# Altium PCB ZeroGravity4Layer.PcbDoc
Units mm, origin at the board's own origin, x right, y up, seen from the top; angles counter-clockwise.
Board outline 55.88 x 54.36 mm, 4 copper layers (Top Layer, GND01, GND02, Bottom Layer), stack 0.603 mm thick; 52 components, 42 nets, 160 pads, 30 vias.
Unrouted connection lines stored in the file: 27.
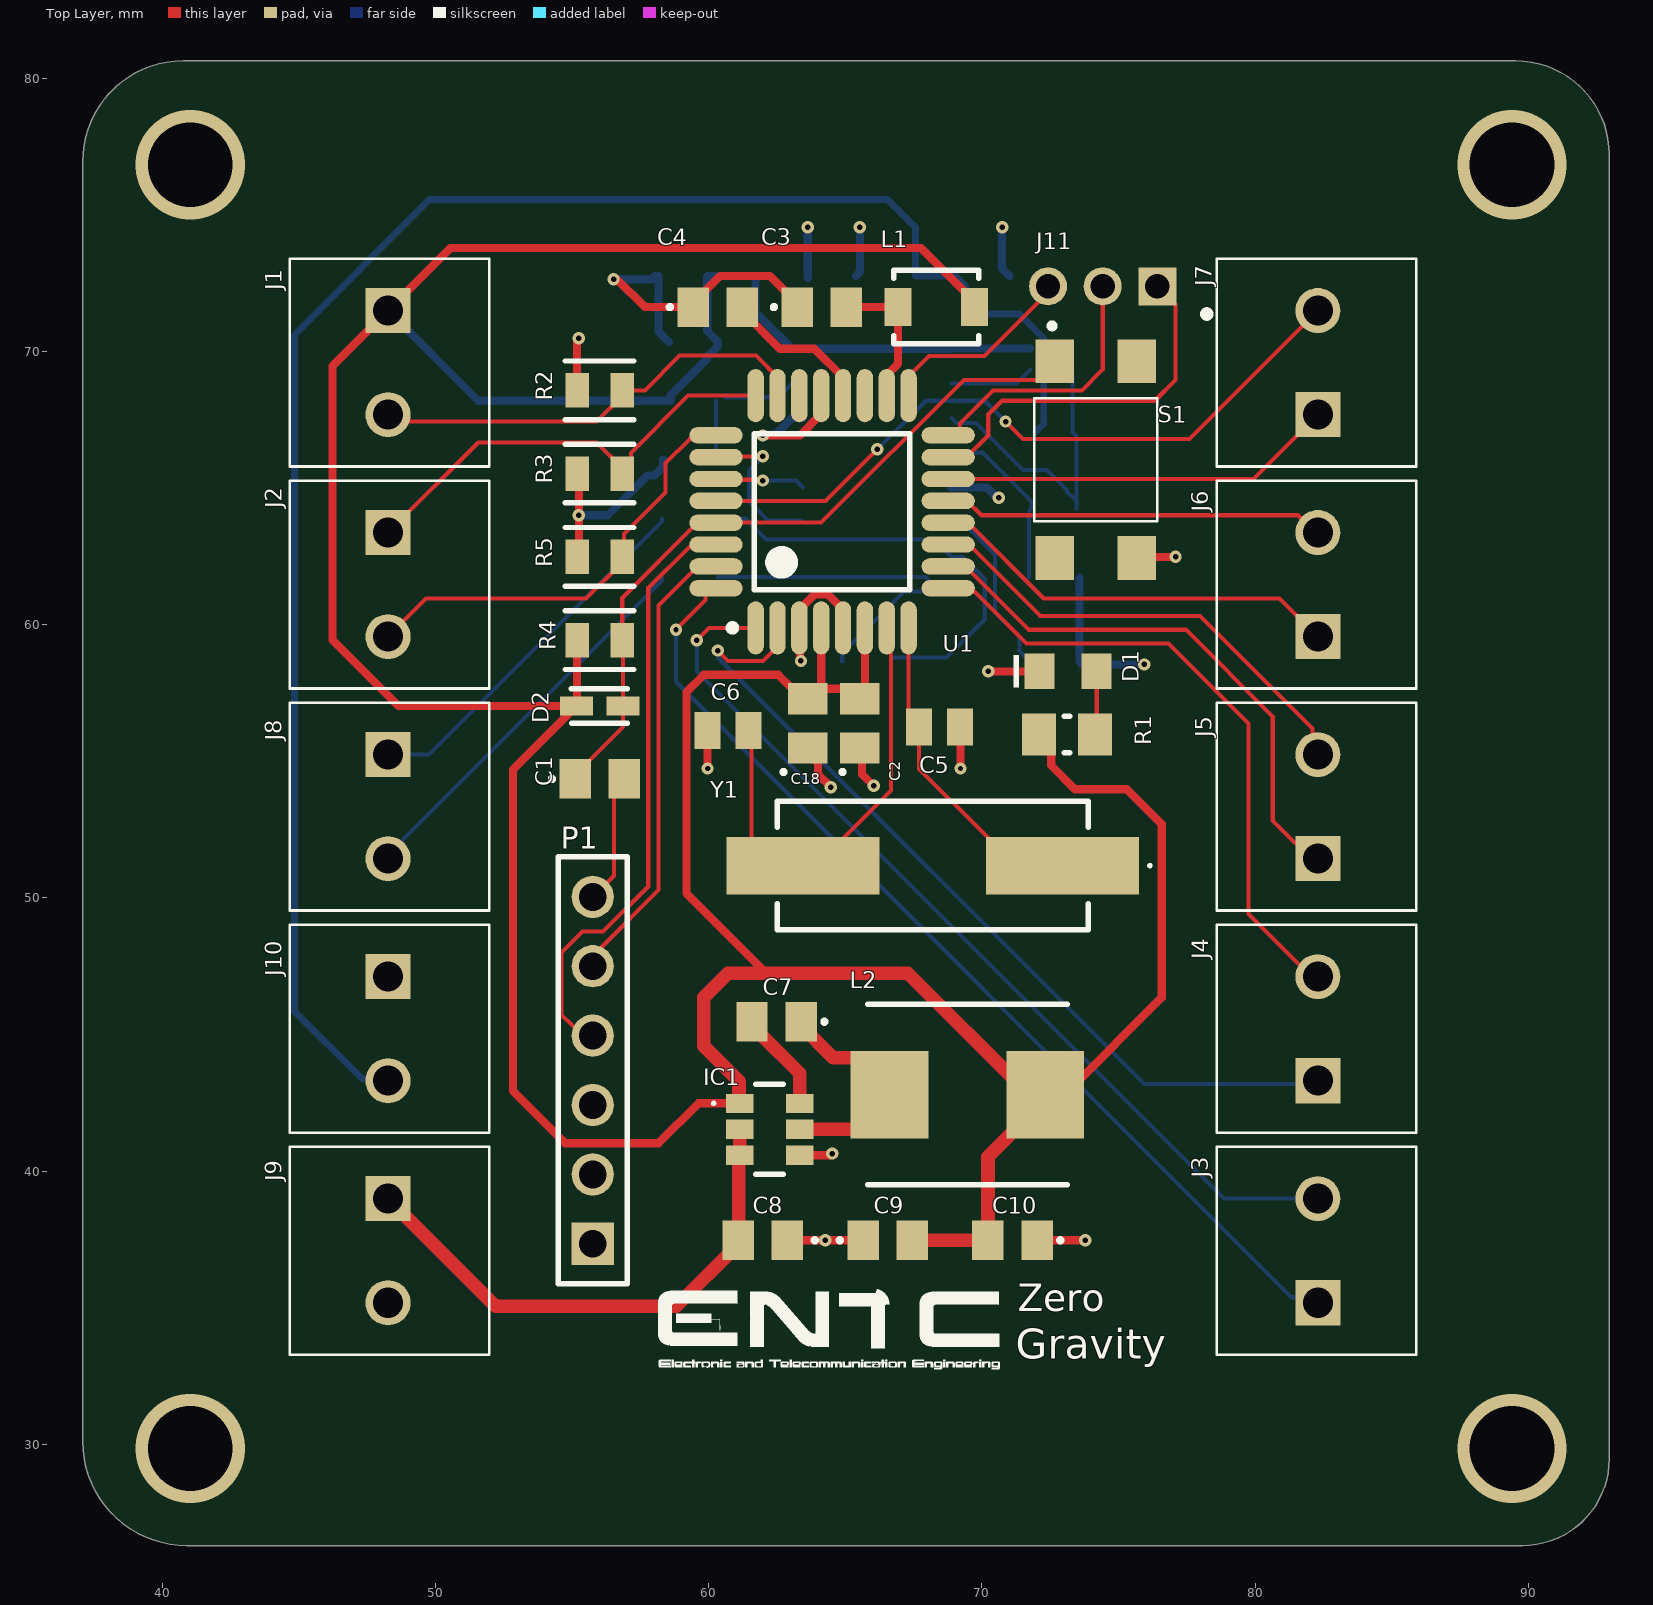
[diagram p0: Top Layer view]
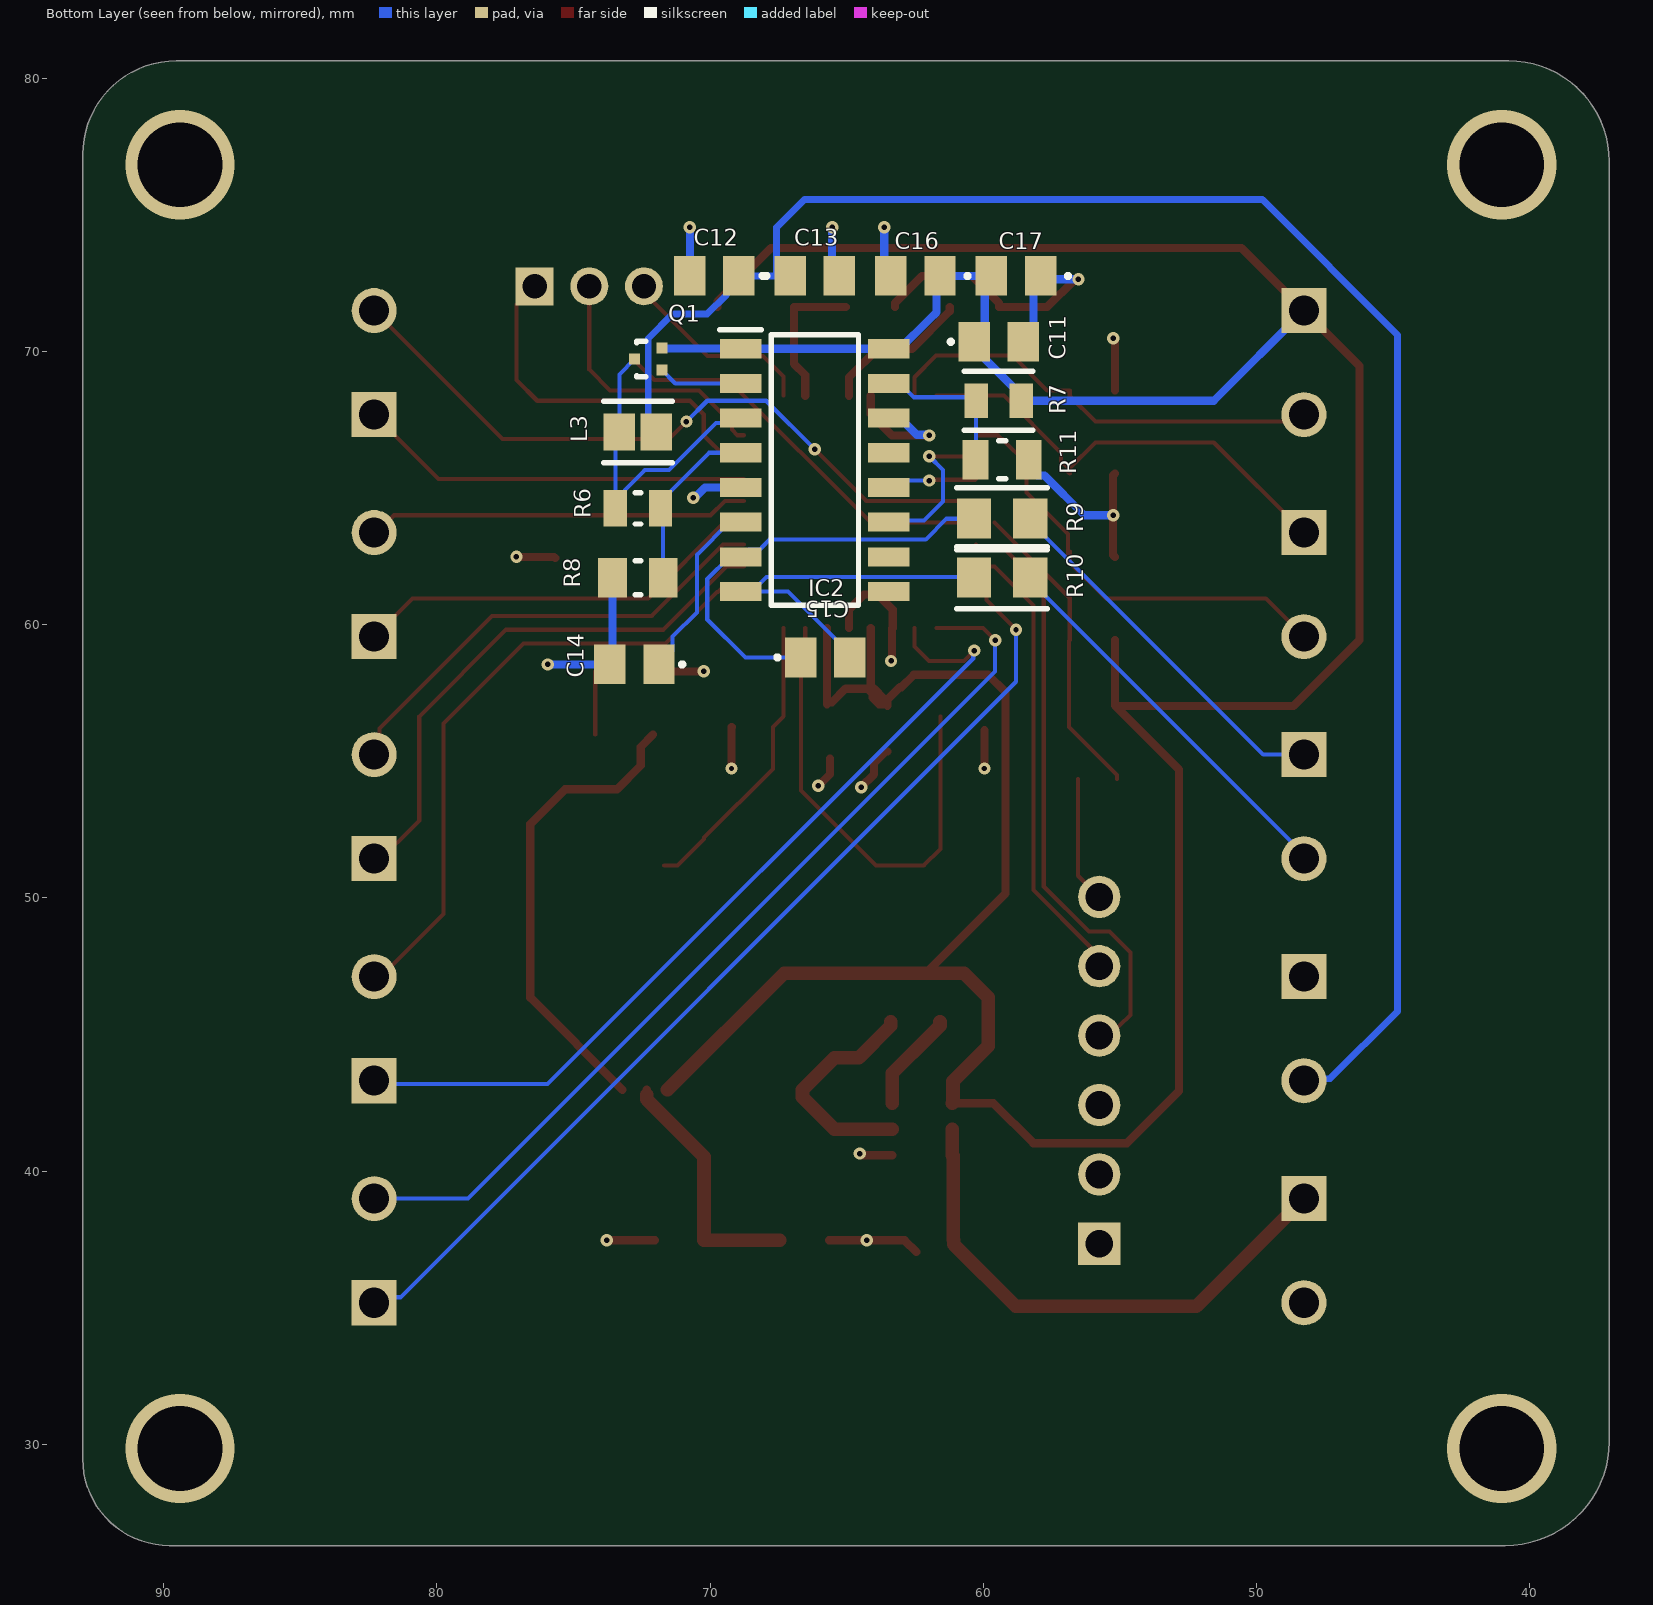
[diagram p1: Bottom Layer view, seen from below]
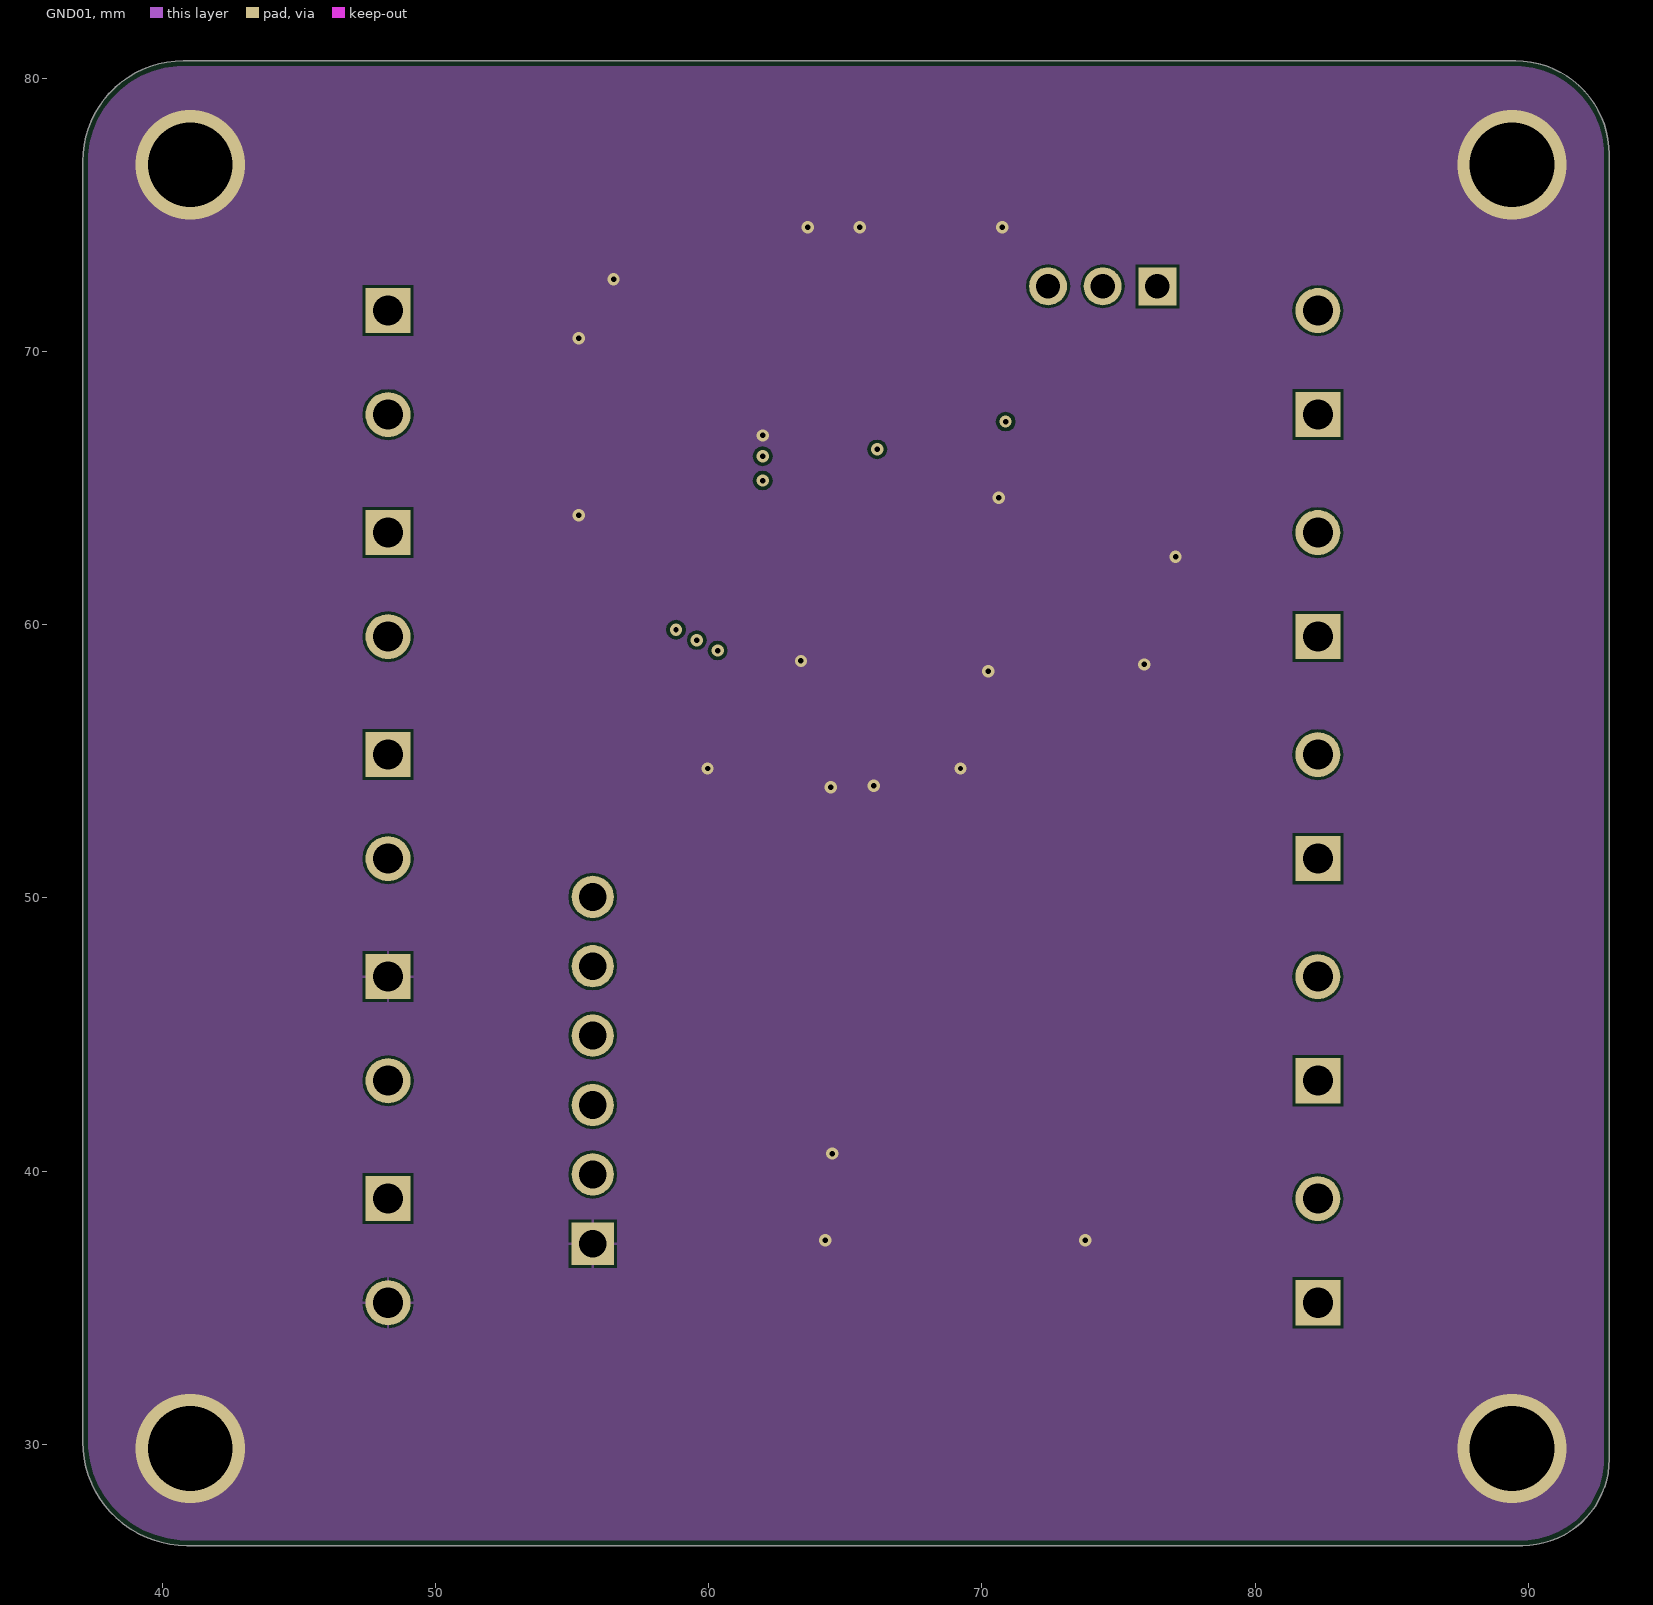
[diagram p2: GND01]
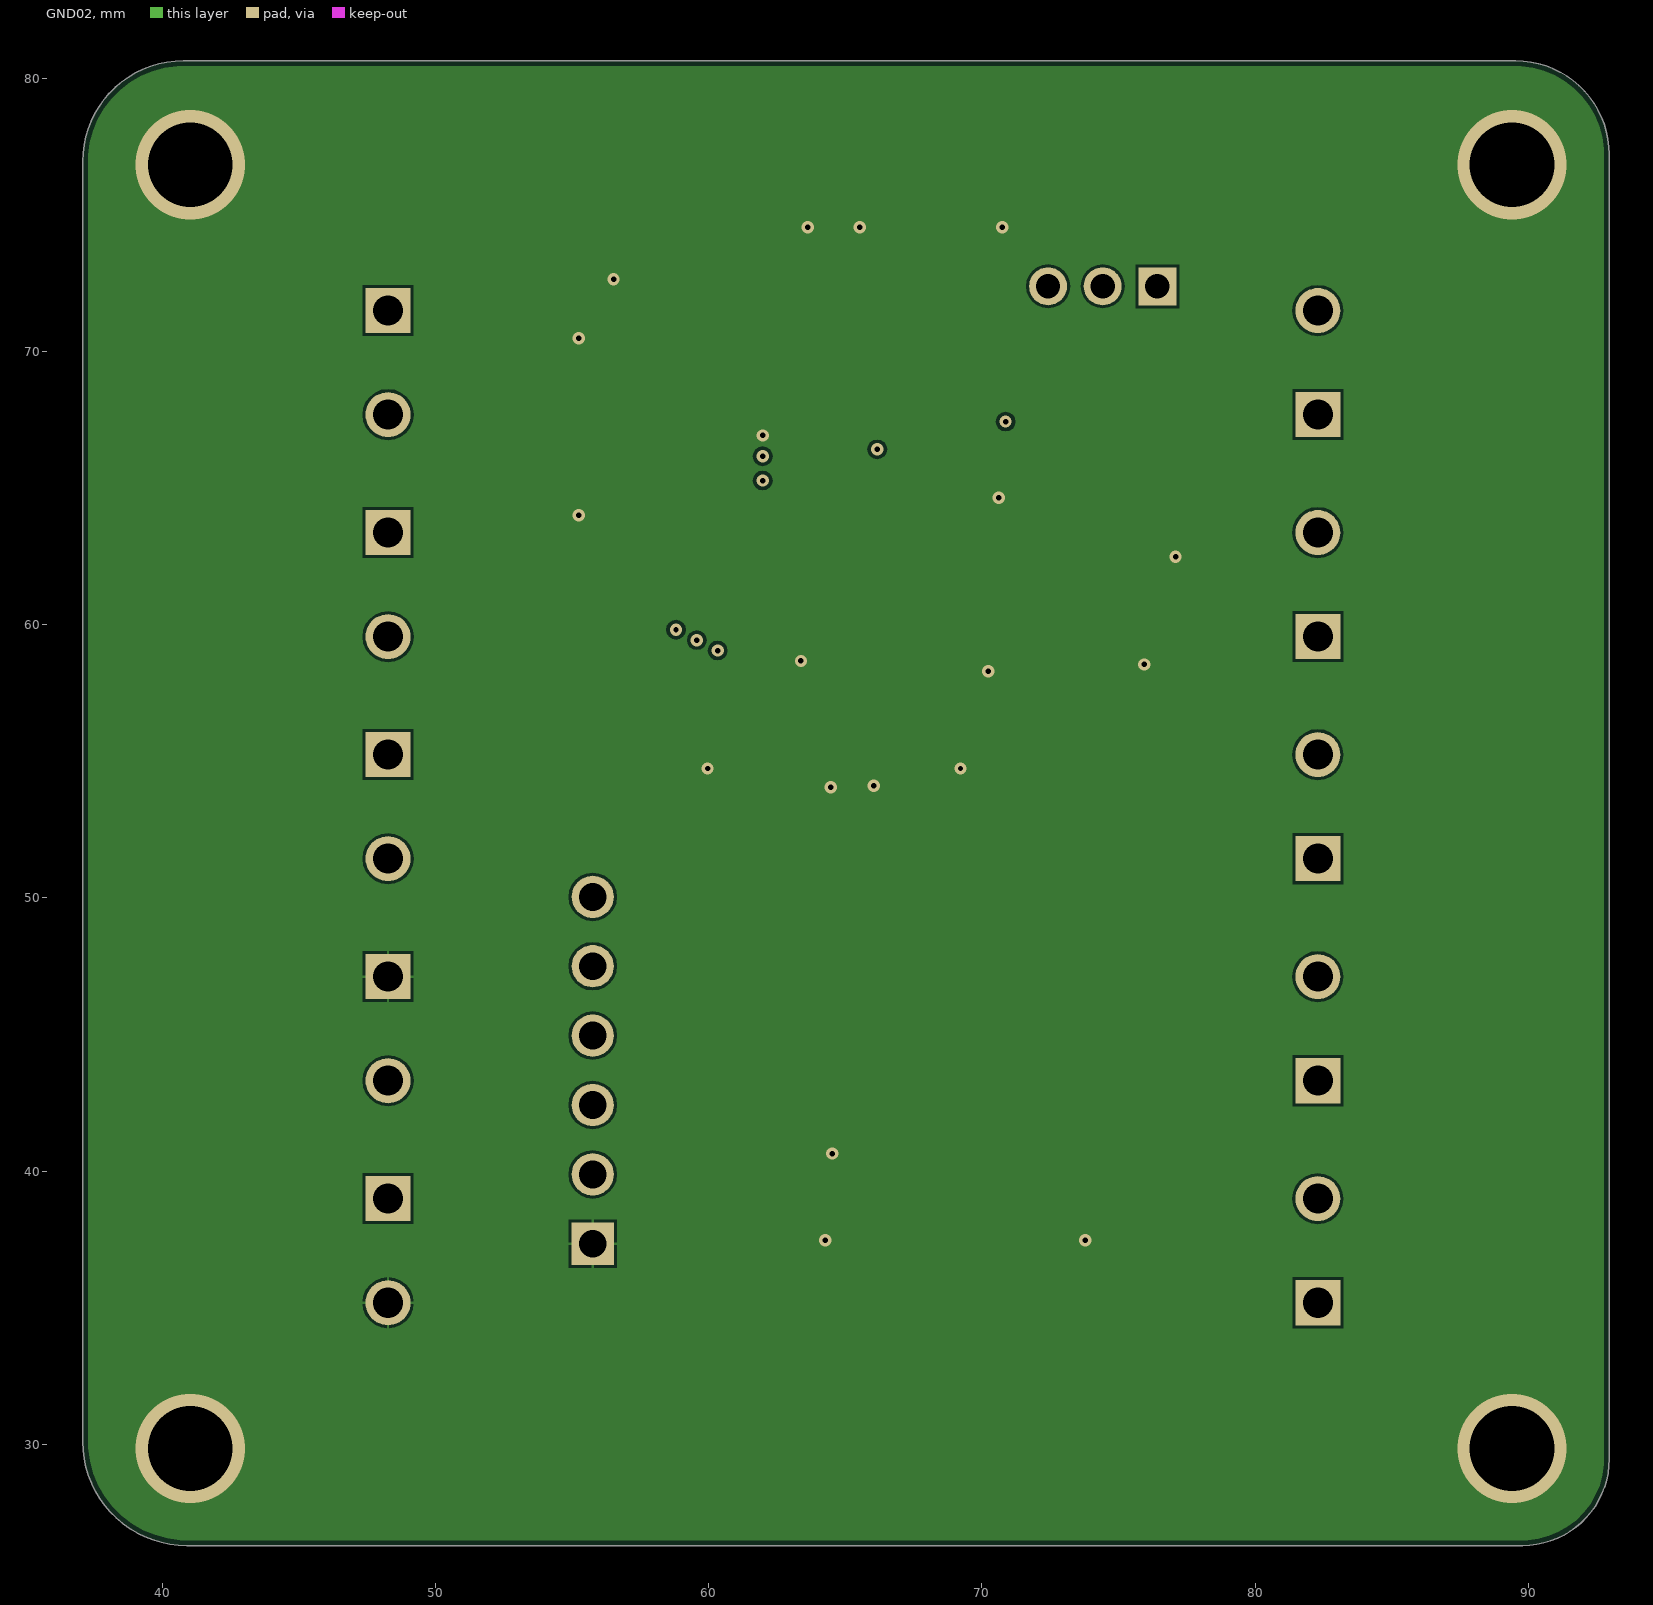
[diagram p3: GND02]
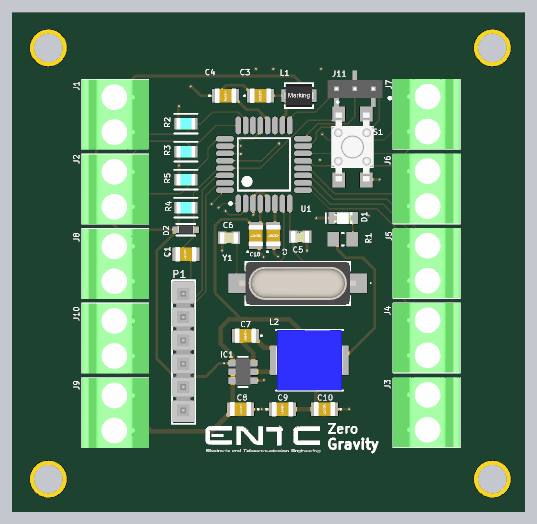
[diagram p4: 3D render of the assembled board from above, using the file's embedded part models]
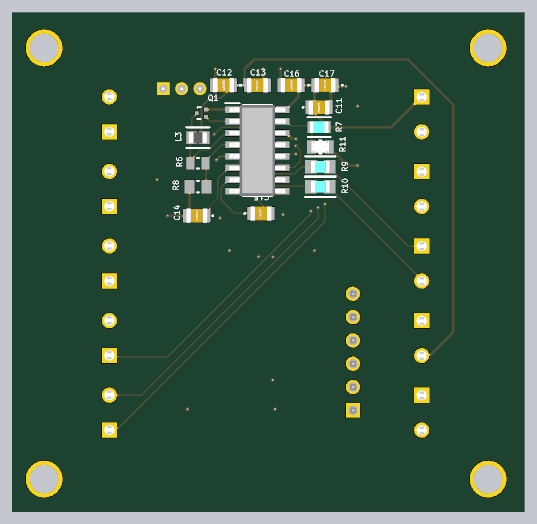
[diagram p5: 3D render of the assembled board from below, using the file's embedded part models]

## Layer stack, top to bottom
Top Solder: solder mask 0.0102, Solder Resist, Dk 3.5
Top Layer: signal copper 0.0356
Dielectric 2: prepreg 0.0711, PP-006, Dk 4.1
GND01: signal copper 0.035
Dielectric 1: dielectric 0.32, FR-4, Dk 4.8
GND02: signal copper 0.035
Dielectric 3: prepreg 0.0711, PP-006, Dk 4.1
Bottom Layer: signal copper 0.0356
Bottom Solder: solder mask 0.0102, Solder Resist, Dk 3.5

## Board outline
40.894,26.289 89.789,26.289 ccw(c89.789,29.464) 92.964,29.464 92.964,77.216 ccw(c89.535,77.216) 89.535,80.645 40.767,80.645 ccw(c40.767,76.962) 37.084,76.962 37.084,30.099 ccw(c40.894,30.099)

## Design rules (kind name [scope] priority, off if disabled: settings)
BoardOutlineClearance [All] p1: gap=0.2 ignorepadtopadclearanceinfootprint=FALSE
Clearance [All] p1: gap=0.102 ignorepadtopadclearanceinfootprint=FALSE except(0.127: Arc-Via Track-Via SMDPad-Via THPad-Via Via-Via Via-Fill Via-Poly Via-Region Via-Text; 0.25: Arc-Hole Track-Hole SMDPad-Hole THPad-Hole Via-Hole Fill-Hole Poly-Hole Region-Hole Text-Hole)
ComponentClearance [All] p1: gap=0.102 collisioncheckmode=3 verticalgap=0.102 showdistances=TRUE
DiffPairsRouting [All] p1: maxlimit=0.102 minlimit=0.102 mostfreqgap=0.102 toplayer_minwidth=0.102 toplayer_maxwidth=1816.048 toplayer_prefwidth=0.102 midlayer1_minwidth=0.102 midlayer1_maxwidth=1816.048 midlayer1_prefwidth=0.102 midlayer2_minwidth=0.102 midlayer2_maxwidth=1816.048 midlayer2_prefwidth=0.102 bottomlayer_minwidth=0.102 bottomlayer_maxwidth=1816.048 bottomlayer_prefwidth=0.102 maxuncoupledlength=12.7
Height [All] p1: minheight=0 maxheight=1816.048 prefheight=12.7
HoleSize [All] p1: absolutevalues=TRUE maxlimit=6.3 minlimit=0.2 maxpercent=80.000 minpercent=20.000
HoleToHoleClearance [All] p1: gap=0.25 allowstackedmicrovias=FALSE
MinimumAnnularRing [All] p1: minimumring=0.076
MinimumSolderMaskSliver [All] p1: minsoldermaskwidth=0
PlaneClearance [All] p1: clearance=0.102
PlaneConnect PlaneConnectPowerPads [InPadClass('PowerPads')] p1: planeconnectstyle=Direct reliefexpansion=0.508 reliefentries=4 reliefconductorwidth=0.254 reliefairgap=0.254
PlaneConnect [All] p2: pad.planeconnectstyle=Relief pad.reliefexpansion=0.3 pad.reliefentries=4 pad.reliefconductorwidth=0.102 pad.reliefairgap=0.102 via.planeconnectstyle=Direct via.reliefexpansion=0.3 via.reliefentries=4 via.reliefconductorwidth=0.127 via.reliefairgap=0.127
PolygonConnect PolygonConnectPowerPads [All vs (InPadClass('PowerPads'))] p1: connectstyle=Direct reliefconductorwidth=0.254 reliefentries=4 polygonreliefangle="90 Angle" airgapwidth=0.254
PolygonConnect [All] p2: thpad.connectstyle=Relief thpad.reliefconductorwidth=0.102 thpad.reliefentries=4 thpad.polygonreliefangle="90 Angle" thpad.airgapwidth=0.102 smdpad.connectstyle=Relief smdpad.reliefconductorwidth=0.102 smdpad.reliefentries=4 smdpad.polygonreliefangle="90 Angle" smdpad.airgapwidth=0.102 via.connectstyle=Direct via.reliefconductorwidth=0.127 via.reliefentries=4 via.polygonreliefangle="90 Angle" via.airgapwidth=0.127
RoutingVias [All] p1: holewidth=0.2 width=0.45 viastyle="Through Hole" minholewidth=0.2 minwidth=0.45 maxholewidth=6.3 maxwidth=6.55
SilkToSilkClearance [All] p1: silktosilkclearance=0
SilkToSolderMaskClearance [IsPad] p1: minsilkscreentomaskgap=0.102 clearancetoexposedcopper=TRUE
SolderMaskExpansion [All] p1: expansion=0.075 istentingtop=FALSE
Width [All] p1: maxlimit=1816.048 minlimit=0.102 preferedwidth=0.102
20 further rules are at their usual default settings.

## Components (designator, comment, footprint, x,y, rotation, side; value= is the part's Value field where it differs from the comment)
C1 "C0805Y104J3RACTU" C0805 56.007,54.356 r0 top value=100nF
C2 "C0805Y104J3RACTU" C0805 65.532,56.388 r90 top value=100nF
C3 "C0805Y104J3RACTU" C0805 64.135,71.628 r0 top value=100nF
C4 "C0805Y104J3RACTU" C0805 60.325,71.628 r0 top value=100nF
C5 "C0805C220F1HACTU" FP-C0805C-DN-MFG 68.453,56.261 r0 top value="22 pF"
C6 "C0805C220F1HACTU" FP-C0805C-DN-MFG 60.706,56.134 r180 top value="22 pF"
C7 "C0805Y104J3RACTU" C0805 62.484,45.466 r180 top value=100nF
C8 "C0805C106K4PAC7210" C0805 61.976,37.465 r180 top value=10uF
C9 "C0805C226K9PACTU" C0805 66.548,37.465 r0 top value=22uF
C10 "C0805C226K9PACTU" C0805 71.12,37.465 r180 top value=22uF
C11 "C0805Y104J3RACTU" C0805 59.436,70.358 r180 bottom value=100nF
C12 "C0805Y104J3RACTU" C0805 69.85,72.771 r0 bottom value=100nF
C13 "C0805C106K4PAC7210" C0805 66.167,72.771 r180 bottom value=10uF
C14 "C0805Y104J3RACTU" C0805 72.771,58.547 r0 bottom value=100nF
C15 "C0805Y104J3RACTU" C0805 65.786,58.801 r180 bottom value=100nF
C16 "C0805Y104J3RACTU" C0805 62.484,72.771 r0 bottom value=100nF
C17 "C0805C106K4PAC7210" C0805 58.801,72.771 r0 bottom value=10uF
C18 "C0805Y104J3RACTU" C0805 63.627,56.388 r90 top value=100nF
D1 "150080RS75000" WL-SMCW_0805_150080xx75000 73.152,58.293 r0 top
D2 "CDSU4148" DIOM179X85N 56.007,57.023 r0 top
IC1 "AP63205WU-7" AP63205WU7 62.23,41.529 r270 top
IC2 "HX711" SOIC127P600X160-16N 66.167,65.659 r180 bottom
J1 "1727010" 1727010 48.26,71.501 r270 top
J2 "1727010" 1727010 48.26,63.373 r270 top
J3 "1727010" 1727010 82.296,35.179 r90 top
J4 "1727010" 1727010 82.296,43.307 r90 top
J5 "1727010" 1727010 82.296,51.435 r90 top
J6 "1727010" 1727010 82.296,59.563 r90 top
J7 "1727010" 1727010 82.296,67.691 r90 top
J8 "1727010" 1727010 48.26,55.245 r270 top
J9 "1727010" 1727010 48.26,38.989 r270 top
J10 "1727010" 1727010 48.26,47.117 r270 top
J11 "TMM-103-03-T-S" FP-TMM-103-03-T-S-MFG 74.422,72.37 r180 top
L1 "744764910" WE-GFH_3225 68.326,71.628 r0 top value=10uH
L2 "SRP7028CC-4R7M" INDPM7366X300N 69.469,42.799 r0 top value=4.7uH
L3 "MLZ2012A3R3WTD25" FP-MLZ2012-0_85-IPC_C 72.644,67.056 r0 bottom value=3.3uH
P1 "TSW-106-07-L-S" SMTC-TSW-106-07-X-S 55.753,37.338 r90 top value=Coding
Q1 "MMBT4403M3T5G" ONSC-SOT-723-3-631AA-01_C_V 72.263,69.723 r0 bottom
R1 "RK73H2ATTD2200F" RESC2013X60X30ML20T20 73.11,55.981 r0 top value=220Ohms
R2 "RK73H2ATTD1001D" FP-RK73H2A-IPC_C 56.007,68.58 r0 top value=1K
R3 "RK73H2ATTD1001D" FP-RK73H2A-IPC_C 56.007,65.532 r0 top value=1K
R4 "RK73H2ATTED1002F" FP-RK73H2A-IPC_C 56.007,59.436 r180 top value=10K
R5 "RK73H2ATTD1001D" FP-RK73H2A-IPC_C 56.007,62.484 r0 top value=1K
R6 "RK73H2ATTD2002F" RESC2013X60X30LL20T20 72.644,64.262 r0 bottom value=20K
R7 "RK73H2ATTED1002F" FP-RK73H2A-IPC_C 59.436,68.199 r0 bottom value=10K
R8 "RK73H2ATTD8201F" RESC2013X60X30NL20T20 72.644,61.722 r180 bottom value=8.2K
R9 "RK73H2ATTED1000F" FP-RK73H2A-IPC_A 59.309,63.881 r0 bottom value=100
R10 "RK73H2ATTED1000F" FP-RK73H2A-IPC_A 59.309,61.722 r0 bottom value=100
R11 "RCC08050000Z0EA" FP-RCC0805-e3-MFG 59.309,66.04 r180 bottom
S1 "TL3305BF160QG" TL3305BF160QG 74.168,66.04 r270 top
U1 "ATmega328P-AU" 32A_M 64.516,64.135 r90 top
Y1 "ABLS-16.000MHz-16-A-4-H-T" ABLS 68.199,51.181 r180 top

## Footprints (in the part's own frame and the unit in brackets; to place one, negate y for a bottom-side part, rotate by r counter-clockwise, add the part's x,y. Pads: shape width x height; smd on the part's side, far side on the other; paste and mask are expansions set on the pad)
32A_M [mm] "Thin QFP, 32-Leads, Body 7x7mm, Pitch 0.8mm, IPC Low Density"
  oval 1.95x0.6 smd: 1(-4.25,2.8) 2(-4.25,2) 3(-4.25,1.2) 4(-4.25,0.4) 5(-4.25,-0.4) 6(-4.25,-1.2) 7(-4.25,-2) 8(-4.25,-2.8) 17(4.25,-2.8) 18(4.25,-2) 19(4.25,-1.2) 20(4.25,-0.4) 21(4.25,0.4) 22(4.25,1.2) 23(4.25,2) 24(4.25,2.8)
  oval 0.6x1.95 smd: 9(-2.8,-4.25) 10(-2,-4.25) 11(-1.2,-4.25) 12(-0.4,-4.25) 13(0.4,-4.25) 14(1.2,-4.25) 15(2,-4.25) 16(2.8,-4.25) 25(2.8,4.25) 26(2,4.25) 27(1.2,4.25) 28(0.4,4.25) 29(-0.4,4.25) 30(-1.2,4.25) 31(-2,4.25) 32(-2.8,4.25)
  silkscreen extent -4.37,-2.85 2.85,3.77, body extent -3.5,-3.5 3.5,3.5, height 1.2
1727010 [mm]
  rect 1.65x1.65 hole 1.1: 1(0,0)
  round 1.65 hole 1.1: 2(3.81,0)
  silkscreen extent -1.9,-3.6 5.71,3.7, body extent -1.87,-3.6 5.75,3.7, height 8.41
ABLS [mm]
  rect 5.6x2.1 smd: 1(-4.75,0) 2(4.75,0)
  silkscreen extent -8,-2.35 5.7,2.35, body extent -6.35,-2.35 6.35,2.35, height 4.2
AP63205WU7 [mm]
  rect 0.7x1 smd: 1(-0.95,-1.099) 2(0,-1.099) 3(0.95,-1.099) 4(0.95,1.099) 5(0,1.099) 6(-0.95,1.099)
  silkscreen extent -1.65,-2.1 1.65,0.49, body extent -1.45,-0.8 1.45,0.8, height 1.1
C0805 [mm]
  rect 1.15x1.45 smd: 1(-0.9,0) 2(0.9,0)
  silkscreen extent -1.8,-0.05 -1.7,0.05, body extent -1.15,-0.78 1.15,0.77, height 0.98
DIOM179X85N [mm]
  rect 1.2x0.7 smd: 1(-0.85,0) 2(0.85,0)
  silkscreen extent -1.03,-0.64 1.02,0.64, body extent -0.85,-0.45 0.85,0.45, height 0.85
FP-C0805C-DN-MFG [mm]
  rect 0.95x1.35 smd paste+0 mask+0: 1(-0.75,0) 2(0.75,0)
  body extent -1.4,-0.85 1.4,0.85, height 0.25
FP-MLZ2012-0_85-IPC_C [mm]
  rect 1.154x1.356 smd paste+0 mask+0: 1(-0.676,0) 2(0.676,0)
  silkscreen extent -1.25,-1.12 1.25,1.12, body extent -1,-0.63 1,0.63, height 1.05
FP-RCC0805-e3-MFG [mm]
  rect 0.95x1.45 smd paste+0 mask+0: 1(-0.975,0) 2(0.975,0)
  silkscreen extent -0.13,-0.7 0.13,0.7, body extent -1,-0.63 1,0.63, height 0.5
FP-RK73H2A-IPC_A [mm]
  rect 1.255x1.462 smd paste+0 mask+0: 1(-1.025,0) 2(1.025,0)
  silkscreen extent -1.65,-1.13 1.65,1.13, body extent -1,-0.63 1,0.63, height 0.6
FP-RK73H2A-IPC_C [mil]
  rect 33.67x49.69 smd paste+0 mask+0: 1(-32.5,0) 2(32.5,0)
  silkscreen extent -49,-42 49,42, body extent -53,-31 53,31, height 10
FP-TMM-103-03-T-S-MFG [mm]
  rect 1.39x1.39 hole 0.89 paste-1000 mask+0: 1(-2,-0.02)
  round 1.39 hole 0.89 paste-1000 mask+0: 2(0,-0.02) 3(2,-0.02)
  silkscreen extent -3.94,0.87 -3.69,1.12, body extent -3.1,-2.07 3.1,2.07, height 0.25
INDPM7366X300N [mm]
  rect 2.85x3.2 smd: 1(-2.85,0) 2(2.85,0)
  silkscreen extent -3.65,-3.3 3.65,3.3, body extent -3.65,-3.3 3.65,3.3, height 3
ONSC-SOT-723-3-631AA-01_C_V [mm] "SOT23, 3-Leads, Body 1.25x0.85mm, Pitch 0.4mm"
  rect 0.4x0.4 smd: 1(-0.5,0.4) 2(-0.5,-0.4) 3(0.5,0)
  silkscreen extent 0.1,-0.65 0.43,0.65, body extent -0.42,-0.63 0.43,0.63, height 0.55
RESC2013X60X30LL20T20 [mm] "Chip Resistor, 2-Leads, Body 2.00x1.25mm, IPC High Density"
  rect 0.85x1.35 smd: 1(-0.825,0) 2(0.825,0)
  silkscreen extent -0.1,-0.58 0.1,0.58, body extent -1.1,-0.72 1.1,0.72, height 0.6
RESC2013X60X30ML20T20 [mm] "Chip Resistor, 2-Leads, Body 2.00x1.25mm, IPC Low Density"
  rect 1.25x1.55 smd: 1(-1.025,0) 2(1.025,0)
  silkscreen extent -0.1,-0.67 0.1,0.67, body extent -1.1,-0.72 1.1,0.72, height 0.6
RESC2013X60X30NL20T20 [mm] "Chip Resistor, 2-Leads, Body 2.00x1.25mm, IPC Medium Density"
  rect 1.05x1.45 smd: 1(-0.925,0) 2(0.925,0)
  silkscreen extent -0.1,-0.63 0.1,0.63, body extent -1.1,-0.72 1.1,0.72, height 0.6
SMTC-TSW-106-07-X-S [mm] ".025 SQ Post Terminal Strip Assembly, 1x6 Pins, Vertical, 2.54mm Pitch, Male"
  rect 1.55x1.55 hole 1.02: 1(0,0)
  round 1.55 hole 1.02: 2(2.54,0) 3(5.08,0) 4(7.62,0) 5(10.16,0) 6(12.7,0)
  silkscreen extent -1.46,-1.27 14.16,1.27, body extent -1.27,-1.24 13.97,1.3, height 8.38
SOIC127P600X160-16N [mm]
  rect 1.525x0.7 smd: 1(-2.712,4.445) 2(-2.712,3.175) 3(-2.712,1.905) 4(-2.712,0.635) 5(-2.712,-0.635) 6(-2.712,-1.905) 7(-2.712,-3.175) 8(-2.712,-4.445) 9(2.712,-4.445) 10(2.712,-3.175) 11(2.712,-1.905) 12(2.712,-0.635) 13(2.712,0.635) 14(2.712,1.905) 15(2.712,3.175) 16(2.712,4.445)
  silkscreen extent -3.47,-4.95 1.6,5.15, body extent -3.06,-4.94 3.06,4.94, height 2.05
TL3305BF160QG [mm]
  rect 1.6x1.4 smd: 1(-3.6,-1.5) 2(3.6,-1.5) 3(-3.6,1.5) 4(3.6,1.5)
  silkscreen extent -5,-2.25 2.25,2.25, body extent -3.75,-2.25 3.75,2.25, height 5
WE-GFH_3225 [mm] "SMT High Frequency Inductor, body 3.4x2.5mm"
  rect 1x1.4 smd: 1(-1.4,0) 2(1.4,0)
  silkscreen extent -1.55,-1.35 1.55,1.35, body extent -1.68,-1.25 1.68,1.25, height 2.19
WL-SMCW_0805_150080xx75000 [mm] "SMD Mono-color Chip LED, body 2.0x1.25mm"
  rect 1.1x1.3 smd: 1(-1.05,0) 2(1.05,0)
  silkscreen extent -2,-0.6 -1.8,0.6, body extent -1,-0.63 1,0.62, height 0.7

## Part data
C1 C2 C3 C4 C7 C11 C12 C14 C15 C16 C18: "Capacitor", Manufacturer_Name=KEMET, Datasheet Link=https://content.kemet.com/datasheets/KEM_C1015_X7R_FF-CAP_SMD.pdf, Height=1.1mm, Manufacturer_Part_Number=C0805Y104J3RACTU
C5 C6: library part CMP-03020-009085-1, "C0805 22 pF X8R 30ppm/°C 1.00% 100 V", Capacitance="22 pF", Manufacturer=KEMET, Package=C0805C-DN, Temperature="-55°C to +125°C", Temperature Characteristic=X8R, Temperature Coefficient=30ppm/°C, Temperature Range High=+125°C, Temperature Range Low=-55°C, Tolerance=0.01, Voltage Rating="100 V", Automotive=No, Category=Cap, ComponentLink2Description=Datasheet, ComponentLink2URL=https://content.kemet.com/datasheets/KEM_C1003_C0G_SMD.pdf, Device Class L1="Passive Components", Device Class L2=Capacitors, Device Class L3="Ceramic Capacitors", Height=0.88mm, Ipc Land Pattern Name=CAPC200125X78, Lead Free=Yes, Manufacturer Part Number=C0805C220F1HACTU, Material=Ceramic, Octopart=https://octopart.com/c0805c220f1hactu-kemet-88726806, RoHS=TRUE
C8 C13 C17: "Capacitor", Manufacturer_Name=KEMET, Mouser Part Number=80-C0805C106K4P7210, Arrow Part Number=C0805C106K4PAC7210, Arrow Price/Stock=https://www.arrow.com/en/products/c0805c106k4pac7210/kemet-corporation, Datasheet Link=https://content.kemet.com/datasheets/KEM_C1006_X5R_SMD.pdf, Height=1.1mm, Manufacturer_Part_Number=C0805C106K4PAC7210, Mouser Price/Stock=https://www.mouser.co.uk/ProductDetail/KEMET/C0805C106K4PAC7210?qs=zDkSFN9STR9jrJZBgSwCDA%3D%3D
C9 C10: "Capacitor", Manufacturer_Name=KEMET, Mouser Part Number=80-C0805C226K9PACTU, Arrow Part Number=C0805C226K9PACTU, Arrow Price/Stock=https://www.arrow.com/en/products/c0805c226k9pactu/kemet-corporation, Datasheet Link=https://content.kemet.com/datasheets/KEM_C1006_X5R_SMD.pdf, Height=1.1mm, Manufacturer_Part_Number=C0805C226K9PACTU, Mouser Price/Stock=https://www.mouser.co.uk/ProductDetail/KEMET/C0805C226K9PACTU?qs=CmJlwSR1kv6i2XEByn7wWw%3D%3D
D1: library part CMP-1426-00011-2, Case Code (Imperial)=0805, Case Code (Metric)=2012, Color=Red, Forward Current=100mA, Forward Voltage=2V, Max Operating Temperature=85°C, Max Reverse Voltage (DC)=5V, Min Operating Temperature=-40°C, Test Current=20mA, Case/Package=0805, Dominant Wavelength=625nm, Height=700µm, Length=2mm, Lens Style="Clear, Rectangular", Luminous Intensity=150mcd, Mount="Surface Mount", NexarPartId=29717781, Packaging="Tape and Reel", Peak Wavelength=630nm, REACH SVHC=Unknown, RoHS=Compliant, Viewing Angle=140°, Wavelength=625nm, Width=1.25mm
D2: "Diode", Manufacturer_Name="Comchip Technology", Mouser Part Number=750-CDSU4148, Arrow Part Number=CDSU4148, Arrow Price/Stock=https://www.arrow.com/en/products/cdsu4148/comchip-technology?region=nac, Datasheet Link=https://datasheet.datasheetarchive.com/originals/distributors/Datasheets-7/DSA-139250.pdf, Height=0.85mm, Manufacturer_Part_Number=CDSU4148, Mouser Price/Stock=https://www.mouser.co.uk/ProductDetail/Comchip-Technology/CDSU4148?qs=tw%252BuQ%2FB6PO1A4Pq3N4jPEA%3D%3D
IC1: "Integrated Circuit", Manufacturer_Name="Diodes Incorporated", Mouser Part Number=621-AP63205WU-7, Arrow Part Number=AP63205WU-7, Arrow Price/Stock=https://www.arrow.com/en/products/ap63205wu-7/diodes-incorporated?region=europe, Datasheet Link=https://www.diodes.com//assets/Datasheets/AP63200-AP63201-AP63203-AP63205.pdf, Height=1mm, Manufacturer_Part_Number=AP63205WU-7, Mouser Price/Stock=https://www.mouser.co.uk/ProductDetail/Diodes-Incorporated/AP63205WU-7?qs=u16ybLDytRZtkj8PzdWCOw%3D%3D
IC2: "Integrated Circuit", Manufacturer_Name=AVIA, Datasheet Link=https://cdn.sparkfun.com/datasheets/Sensors/ForceFlex/hx711_english.pdf, Height=1.6mm, Manufacturer_Part_Number=HX711
J1 J2 J3 J4 J5 J6 J7 J8 J9 J10: "Connector", Manufacturer_Name="Phoenix Contact", Mouser Part Number=651-1727010, Arrow Part Number=1727010, Arrow Price/Stock=https://www.arrow.com/en/products/1727010/phoenix-contact?region=nac, Datasheet Link=https://datasheet.datasheetarchive.com/originals/distributors/SFDatasheet-2/sf-00050638.pdf, Height=8.65mm, Manufacturer_Part_Number=1727010, Mouser Price/Stock=https://www.mouser.co.uk/ProductDetail/Phoenix-Contact/1727010?qs=JcjeNNoqGSMjtHhQoBJ7UA%3D%3D
J11: library part CMP-02766-001695-1, "CONN HEADER VERT 3POS 2MM", Color=Black, Max Current Rating=3.9A, Max Operating Temperature=105°C, Max Voltage Rating (AC)=500V, Min Operating Temperature=-55°C, Package Quantity=1, Connector Type=Header, Contact Finish - Mating=TIN, Contact Material=Bronze, Contact Mating Length=0.157inch, Contact Plating=Tin, Contact Shape=Square, Contact Type="Male Pin", Depth=1.97mm, Fastening Type=Pull, Gender=Male, Housing Color=Black, Housing Material=Polymer, Insulation Color=Black, Insulation Material=Polymer, Lead Free="Lead Free", Length=6mm, Mount="Through Hole", Number of Contacts=3, Number of Positions=3, Number of Rows=1, Orientation=Straight, Packaging=Bulk, Pitch=2mm, Radiation Hardening=No, REACH SVHC="No SVHC", RoHS Compliant=Yes, Series=TMM, Termination=Solder
L1: library part CMP-03913-61645378-1, "744764910 General Purpose Inductor, 10uH, 10%, 1 Element, SMD, 1210", Ambient Temperature Range High=85°C, Ambient Temperature Range Low=-40°C, Case/Package=Nonstandard, Current Rating=500mA, DC Resistance (DCR)=995mΩ, Inductance=10µH, Inductance Tolerance=10%, Max Operating Temperature=125°C, Self Resonant Frequency=40MHz, Test Frequency=1.47MHz, Core Material=Ferrite, Height=2.2mm, Height - Seated (Max)=2.3876mm, Length=3.2mm, Max DC Current=500mA, Min Operating Temperature=-40°C, Mount="Surface Mount", NexarPartId=61645378, Packaging="Tape & Reel (TR)", REACH SVHC=Unknown, RoHS=Compliant, Shielding=Unshielded, Tolerance=10%, Width=2.5mm
L2: "Inductor", Manufacturer_Name=Bourns, Mouser Part Number=652-SRP7028CC-4R7M, Datasheet Link=https://www.bourns.com/docs/Product-Datasheets/SRP7028CC.pdf, Height=3mm, Manufacturer_Part_Number=SRP7028CC-4R7M, Mouser Price/Stock=https://www.mouser.co.uk/ProductDetail/Bourns/SRP7028CC-4R7M?qs=1Kr7Jg1SGW%252BnpjZpZxrorQ%3D%3D
L3: library part CMP-08253-000097-1, "Shielded Multilayer Inductor 3.3uH ±20% 450mA 442mΩ AEC-Q200 SMD 0805", Case Code (Imperial)=0805, Case Code (Metric)=2012, Current Rating=450mA, DC Resistance (DCR)=442mR, Inductance=3.3uH, Max Operating Temperature=125°C, Min Operating Temperature=-55°C, Package Quantity=4000, Ratings=AEC-Q200, Resistance=0.442R, Saturation Current=200mA, Test Frequency=10MHz, Tolerance=20%, Case/Package=0805, Core Material=Ferrite, Height=0.85mm, Height - Seated (Max)=0.041inch, Length=0.079inch, Max DC Current=450mA, Mount="Surface Mount", Packaging="Tape and Reel", RoHS Compliant=Yes, Shielding=Shielded, Termination=SMD/SMT, Weight=0.000194oz, Width=0.049inch
P1: library part CMP-1024-00386-1, "0.025\" SQ Post Header, Through-hole, Vertical, -55 to 125 degC, 2.54 mm Pitch, 6-Pin, Male, RoHS", Manufacturer=Samtec, Temperature Range="-55 to 125 degC", ComponentLink1Description="Manufacturer URL", ComponentLink1URL=http://www.samtec.com, ComponentLink2Description=Datasheet, ComponentLink2URL=http://www.samtec.com/documents/webfiles/pdf/TSW_TH.PDF, ComponentLink3Description="Package Specification", ComponentLink3URL=http://www.samtec.com/documents/webfiles/cpdf/TSW-XXX-XX-XXX-X-XX-XXX-MKT.pdf, DatasheetVersion=F-214, Mounting Technology=Through-hole, Orientation=Vertical, PackageDescription=".025[0.64] SQ. Post Terminal Strip Assembly", PackageReference=TSW-106-07-X-S, PackageVersion="DM, 8/1988", PartNumber=TSW-106-07-L-S, Pitch="2.54 mm", RoHS=True
Q1: library part CMP-1048-00929-1, "PNP Switching Transistor, 3-Pin SOT-723, Pb-Free, Tape and Reel", Manufacturer="On Semiconductor", ComponentLink1Description="Manufacturer URL", ComponentLink1URL=http://www.onsemi.com/, ComponentLink2Description=Datasheet, ComponentLink2URL=http://www.onsemi.com/pub_link/Collateral/MMBT4403M3-D.PDF, ComponentLink3Description="Package Specification", ComponentLink3URL=http://www.onsemi.cn/pub_link/Collateral/BAT54M3-D.PDF, DatasheetVersion="Rev. 0", fT Min (MHz)=200, IC Continuous (A)=-0.6, Model=MMBT4403, Mounting Technology="Surface Mount", PackageDescription="3-Pin SOT223, Body 0.8 x 1.2 mm, Pitch 0.4 mm", PackageReference=SOT-723-3-631AA-01_C, PackageVersion="Rev. C, 08/2006", Packing="Tape and Reel", PartNumber=MMBT4403M3T5G, Polarity=PNP, RoHS=TRUE
R1: library part CMP-2001-02206-1, Manufacturer="KOA Speer", Part Number=RK73H2ATTD2200F
R2 R3 R5: library part CMP-04015-089471-1, "1kΩ ±0.5% 0.25W Chip Resistor 0805 Thick Film AEC-Q200 Qualified", RoHS Compliant=Yes
R4 R7: library part CMP-04015-088604-1, "10kΩ ±1% 0.25W Chip Resistor 0805 Thick Film AEC-Q200 Qualified", Case Code (Imperial)=0805, Case Code (Metric)=2012, Max Operating Temperature=155°C, Min Operating Temperature=-55°C, Package Quantity=10000, Power Rating=125mW, Resistance=10kR, Resistor Type="Thick Film", Temperature Coefficient=100ppm/°C, Tolerance=1%, Voltage Rating=150V, Case/Package=0805, Construction=Rectangular, Depth=1.25mm, Height=0.5mm, Lead Free="Lead Free", Length=2mm, Military Standard=Not, Packaging="Tape and Reel", RoHS Compliant=Yes, Series=RK73H, Termination=SMD/SMT, Width=1.25mm
R6: library part CMP-2001-02185-1, Manufacturer="KOA Speer", Part Number=RK73H2ATTD2002F
R8: library part CMP-2001-02517-1, Manufacturer="KOA Speer", Part Number=RK73H2ATTD8201F
R9 R10: library part CMP-04015-093159-1, "100Ω ±1% 0.25W Chip Resistor 0805 Thick Film AEC-Q200 Qualified", Case Code (Imperial)=0805, Case Code (Metric)=2012, Max Operating Temperature=155°C, Min Operating Temperature=-55°C, Power Rating=125mW, Resistance=100R, Resistor Type="Thick Film", Temperature Coefficient=100ppm/°C, Tolerance=1%, Voltage Rating=150V, Case/Package=0805, Construction=Rectangular, Depth=1.25mm, Lead Free="Lead Free", Length=2mm, Military Standard=Not, Packaging="Tape and Reel", Series=RK73H, Termination=SMD/SMT
R11: library part CMP-00030-108211984-1, "RCC08050000Z0EA Res Thick Film 0805 0 Ohm Conformal Coated Pad SMD Automotive AEC-Q200 T/R", Case/Package=0805, Max Operating Temperature=155°C, Min Operating Temperature=-55°C, Power Rating=250mW, Resistance=0Ω, Voltage Rating=200V, Composition="Thick Film", Height=500µm, NexarPartId=108211984
S1: "Switch", Manufacturer_Name=E-Switch, Mouser Part Number=612-TL3305BF160QG, Datasheet Link=https://configured-product-images.s3.amazonaws.com/2D/specs/TL3305BF160QG.pdf, Height=5.25mm, Manufacturer_Part_Number=TL3305BF160QG, Mouser Price/Stock=https://www.mouser.co.uk/ProductDetail/E-Switch/TL3305BF160QG?qs=UrFqKgNWc7SMzrRgAbHJ9w%3D%3D
U1: library part CMP-0095-00269-2, "8-bit AVR Microcontroller, 32KB Flash, 1KB EEPROM, 2KB SRAM, 32-pin TQFP, Industrial Grade (-40°C to 85°C)", Code_JEDEC=MS-026-ABA, ComponentLink1Description="Manufacturer URL", ComponentLink1URL=http://www.atmel.com/, ComponentLink2Description="ATmega48A/48PA/88A/88PA/168A/168PA/328/328P Datasheet", ComponentLink2URL=http://www.atmel.com/dyn/resources/prod_documents/doc8271.pdf, ComponentLink3Description="ATmega48A/48PA/88A/88PA/168A/168PA/328/328P Summary", ComponentLink3URL=http://www.atmel.com/dyn/resources/prod_documents/8271S.pdf, DatasheetVersion="revD, May-2011", PackageDescription="32-Lead, 7x7x1.0 mm Body, 0.8mm Lead Pitch, Thin Profile Plastic Quad Flat Package (TQFP)", PackageReference=32A, PackageVersion="revC, Oct-2010", RevisionNote="DatasheetVersion & PackageVersion updated. URLs added."
Y1: "Crystal or Oscillator", Arrow Part Number=ABLS-16.000MHZ-16-A-4-H-T, Manufacturer_Name=ABRACON, Mouser Part Number=815-LS16000MHZ16A4HT, Arrow Price/Stock=https://www.arrow.com/en/products/abls-16.000mhz-16-a-4-h-t/abracon, Datasheet Link=https://abracon.com/Resonators/abls.pdf, Manufacturer_Part_Number=ABLS-16.000MHz-16-A-4-H-T, Mouser Price/Stock=https://www.mouser.co.uk/ProductDetail/ABRACON/ABLS-16.000MHZ-16-A-4-H-T?qs=vLWxofP3U2z6hhU1at4Vrw%3D%3D

## Via types
v1: diameter 0.45, hole 0.2, Top Layer to Bottom Layer, tented both sides, 26 vias
v2: diameter 4, hole 3.1, Top Layer to Bottom Layer, 4 vias

## Nets (pads, with @x,y where several pads share a name; then routed paths per layer and width w, separated by ;. In a path a pad name is that pad's centre, name@x,y a point inside that pad or via, vN(x,y) a via of type N, cw(c..) or ccw(c..) an arc to the next point about the centre after c; other vN are vias at no path point)
+5: C2.2 C9.2 C10.2 C11.1 C16.1 C17.2 C18.2 D2.1 IC1.1 IC2.1 IC2.16 J1.1 L1.2 L2.2 Q1.2 R1.1 R4.2 R7.1 U1.4 U1.6 | length 173.9
  Top Layer w0.3: R4.2 55.182,57.048 D2.1 ; IC1.1 59.624,42.479 58.166,41.021 54.737,41.021 52.832,42.926 52.832,54.698 D2.1 ; 62.103,47.244 59.182,50.165 59.182,57.531 59.817,58.166 62.544,58.166 62.997,57.713 63.052,57.713 63.51,57.255 C18.2@63.51,57.031 ; C18.2@63.57,57.091 63.818,57.091 64.059,57.332 C18.2@64.059,57.531 ; C18.2 63.997,57.658 C18.2@64.116,57.658 ; C18.2@64.116,57.542 C18.2@64.116,57.658 ; U1.4 C18.2@64.116,57.658 ; C2.2@65.532,57.161 65.035,57.658 C18.2@64.116,57.658 ; C2.2@65.716,57.091 U1.6 ; L1.2 69.726,71.828 67.767,73.787 50.546,73.787 J1.1 46.228,69.469 46.228,59.436 48.641,57.023 D2.1 ; R1.1 72.537,55.529 72.537,54.844 73.406,53.975 75.311,53.975 76.581,52.705 76.581,46.347 L2.2@73.208,42.974 ; L2.2 L2.2@72.319,42.974
  Top Layer w0.5: IC1.1 61.108,42.502 61.108,43.286 59.817,44.577 59.817,46.355 60.706,47.244 62.103,47.244 67.287,47.244 L2.2@71.557,42.974 ; C9.2 C10.2 70.22,40.525 72.319,42.624 L2.2
  Bottom Layer w0.3: J1.1 51.562,68.199 R7.1 58.611,68.402 59.911,69.703 59.911,69.783 C11.1@60.336,70.208 ; C11.1 59.944,70.75 59.944,72.771 61.711,72.771 61.711,71.436 61.976,71.171 63.043,70.104 IC2.16 IC2.1 68.889,70.114 71.754,70.114 Q1.2
A+: J8.2 R10.1 | length 14.4
  Bottom Layer w0.15: J8.2 48.26,51.595 58.284,61.619 R10.1
A-: J8.1 R9.1 | length 13.7
  Bottom Layer w0.15: J8.1 49.751,55.245 58.284,63.778 R9.1
AREF: C4.2 U1.20 | length 5.5
  Top Layer w0.3: C4.2 61.225,71.478 62.602,70.101 63.875,70.101 64.916,69.06 U1.20
AVCC: C3.2 L1.1 U1.18 | length 5.3
  Top Layer w0.3: C3.2 L1.1 66.926,69.551 66.516,69.141 U1.18
AVDD_HX: IC2.3 L3.2 Q1.3 R6.2 | length 11.6
  Bottom Layer w0.15: IC2.3 69.062,67.381 69.779,67.381 71.501,65.659 72.39,65.659 73.119,64.93 73.119,64.862 73.401,64.58 R6.2@73.469,64.58 ; Q1.3 73.32,69.166 L3.2 73.469,66.907 R6.2@73.469,64.58 ; R6.2 R6.2@73.469,64.58
BASE_HX: IC2.2 Q1.1 | length 3.1
  Bottom Layer w0.15: IC2.2 71.274,68.834 Q1.1
BST: C7.2 IC1.6 | length 3.7
  Top Layer w0.5: C7.2 61.584,45.316 61.909,44.991 61.917,44.991 63.329,43.579 IC1.6
DTR: C1.2 P1.6 | length 4.6
  Top Layer w0.15: P1.6 56.526,50.811 C1.2@56.526,54.356
E+: C12.1 C13.1 J10.2 L3.1 | length 65.5
  Bottom Layer w0.25: J10.2 48.187,43.38 47.298,43.38 44.831,45.847 44.831,70.612 49.784,75.565 66.548,75.565 67.564,74.549 67.564,72.771 C12.1@68.956,72.771 ; C12.1@69.056,72.75 69.4,72.405 69.4,72.078 70.104,71.374 71.374,71.374 72.263,70.485 72.263,67.351 L3.1
GND: C2.1 C3.1 C4.1 C5.2 C6.2 C8.1 C9.1 C10.1 C11.2 C12.2 C13.2 C14.2 C16.2 C17.1 C18.1 D1.1 IC1.4 IC2.5 IC2.14 J9.2 J10.1 P1.1 R2.1 R3.1 R5.1 R8.1 R11.2 S1.4 U1.3 U1.5 U1.21 | length 59.4
  Top Layer w0.3: R5.1 55.245,62.547 v1(55.245,64.008) 55.245,65.469 R3.1 ; R2.1 55.182,70.381 55.245,70.444 v1(55.245,70.485) ; v1@56.642,72.644 57.658,71.628 C4.1 59.425,71.778 60.418,72.771 62.242,72.771 63.235,71.778 C3.1 ; v1(59.956,54.737) C6.2 ; v1(61.976,66.929) 63.335,66.929 64.116,67.71 U1.21 ; C8.1@62.451,37.04 C8.1 v1(64.262,37.465) C9.1 ; IC1.4 64.414,40.579 64.475,40.64 v1(64.516,40.64) ; v1(63.373,58.674) 63.344,58.703 63.344,59.856 U1.3 63.316,60.56 63.868,61.112 64.364,61.112 64.916,60.56 U1.5 ; C18.1@63.5,55.361 63.574,55.361 63.999,54.936 63.999,54.523 v1(64.468,54.054) ; C2.1@65.615,55.107 65.615,54.527 v1(66.04,54.102) ; C5.2 69.215,56.249 v1(69.215,54.737) ; v1(70.231,58.293) D1.1 ; C10.1 v1(73.787,37.465) ; S1.4 75.712,62.484 v1(77.089,62.484)
  Bottom Layer w0.3: v1(55.245,64.008) 56.302,64.008 57.759,65.465 58.009,65.465 58.334,65.79 R11.2 ; v1(56.515,72.644) 57.901,72.644 C17.1@58.028,72.771 ; C17.1@58.155,72.771 58.155,72.644 58.155,70.739 C11.2 ; v1(61.976,66.929) 62.005,66.958 62.436,66.958 63.043,67.564 IC2.14 ; C16.2@63.627,72.697 v1(63.627,74.549) ; C13.2@65.394,72.771 65.532,72.909 v1(65.532,74.549) ; IC2.5 70.19,65.024 70.571,64.643 v1(70.612,64.643) ; v1(70.739,74.549) 70.739,73.036 C12.2@71.004,72.771 ; R8.1 73.569,58.649 C14.2 v1(75.946,58.547)
  other v2: 41.021,29.845 89.408,29.845 41.021,76.835 89.408,76.835
INA+: C15.2 IC2.8 R10.2 | length 13.6
  Bottom Layer w0.15: R10.2 60.353,61.741 67.94,61.741 IC2.8@68.467,61.214 ; C15.2@64.886,58.651 C15.2 64.886,58.951 65.386,59.451 67.149,61.214 IC2.8@68.467,61.214 ; IC2.8 IC2.8@68.467,61.214
INA-: C15.1 IC2.7 R9.2 | length 16.2
  Bottom Layer w0.15: R9.2 61.341,63.881 62.103,63.119 67.818,63.119 68.072,62.865 68.178,62.759 68.604,62.759 IC2.7 69.291,62.484 70.104,61.671 70.104,60.198 68.707,58.801 C15.1
LED+: D1.2 R1.2 | length 2.3
  Top Layer w0.15: R1.2@74.202,55.981 D1.2
MISO: J11.2 U1.16 | length 10.2
  Top Layer w0.15: U1.16 68.995,66.935 69.203,67.143 69.203,67.372 70.411,68.58 73.66,68.58 74.422,69.342 J11.2 ; J11.2@74.566,72.52 J11.2@74.803,72.757
MOSI: J11.1 U1.15 | length 13.5
  Top Layer w0.15: U1.15 69.437,66.135 70.231,66.929 70.231,67.691 70.739,68.199 76.327,68.199 77.089,68.961 77.089,71.723 76.549,72.263 J11.1@76.549,72.287
PB0_03_ENA-: J6.1 U1.12 | length 15.3
  Top Layer w0.15: U1.12 69.488,63.735 72.263,60.96 80.899,60.96 J6.1
PB1_03_DIR-: J6.2 U1.13 | length 14.7
  Top Layer w0.15: U1.13 69.45,64.535 69.977,64.008 81.57,64.008 82.205,63.373 J6.2 J6.2@81.966,63.373 ; J6.2@82.037,62.86 J6.2@82.296,63.119
PB2_03_PUL-: J7.1 U1.14 | length 14.5
  Top Layer w0.15: U1.14 79.94,65.335 J7.1
PC0_P_Sense01: J1.2 R2.2 U1.23 | length 16.5
  Top Layer w0.15: J1.2 48.514,67.437 55.893,67.437 56.832,68.377 R2.2 57.658,68.58 58.928,69.85 61.726,69.85 62.516,69.06 U1.23
PC1_P_Sense02: J2.1 R3.2 U1.24 | length 16.9
  Top Layer w0.15: J2.1 51.562,66.675 55.893,66.675 56.832,65.735 56.832,65.602 R3.2 56.902,65.602 56.902,65.735 57.149,65.982 57.149,66.293 59.241,68.385 U1.24
PC2_P_Sense03: J2.2 R5.2 U1.25 | length 16.5
  Top Layer w0.15: J2.2 49.657,60.96 55.512,60.96 56.832,62.281 R5.2 ; R5.2@56.832,62.687 R5.2 ; U1.25 59.469,66.935 59.322,66.788 59.295,66.788 58.42,65.913 58.42,64.838 56.902,63.32 56.902,62.554 R5.2
PC3_PDSCK_HX: IC2.11 U1.26 | length 5.9
  Top Layer w0.15: U1.26 60.282,66.151 61.96,66.151 v1(61.976,66.167)
  Bottom Layer w0.15: v1(61.976,66.167) 61.468,65.659 61.468,64.516 62.174,63.81 63.399,63.81 IC2.11
PC4_DOUT_HX: IC2.12 U1.27 | length 3.3
  Top Layer w0.15: U1.27 60.294,65.306 61.948,65.306 v1(61.976,65.278)
  Bottom Layer w0.15: v1(61.976,65.278) 63.201,65.278 IC2.12
PC5_Safety: J7.2 U1.28 | length 26.1
  Top Layer w0.15: U1.28 64.281,64.535 v1(66.167,66.421) ; v1(70.866,67.437) 71.501,66.802 77.597,66.802 J7.2
  Bottom Layer w0.15: v1(66.167,66.421) 67.945,68.199 70.104,68.199 v1(70.866,67.437)
PD2_01_ENA-: J3.1 U1.32 | length 37
  Top Layer w0.15: v1(58.801,59.817) 59.882,60.898 59.882,61.127 60.09,61.335 U1.32
  Bottom Layer w0.15: v1(58.801,59.817) 58.801,57.912 81.334,35.379 82.096,35.379 J3.1
PD3_01_DIR-: J3.2 U1.1 | length 34.2
  Top Layer w0.15: v1(59.563,59.436) 60.012,59.885 U1.1
  Bottom Layer w0.15: v1(59.563,59.436) 59.563,58.293 78.867,38.989 J3.2
PD4_01_PUL-: J4.1 U1.2 | length 31.9
  Top Layer w0.15: v1(60.325,59.055) 60.706,58.674 61.98,58.674 62.516,59.21 U1.2
  Bottom Layer w0.15: v1(60.325,59.055) 60.366,59.014 60.366,58.76 75.946,43.18 J4.1@82.296,43.18
PD5_02_ENA-: J4.2 U1.9 | length 23.6
  Top Layer w0.15: U1.9 69.563,61.335 69.704,61.194 69.743,61.194 71.628,59.309 76.835,59.309 79.756,56.388 79.756,49.403 J4.2@82.296,46.863
PD6_02_DIR-: J5.1 U1.10 | length 20.3
  Top Layer w0.15: U1.10 69.395,62.135 71.713,59.817 77.47,59.817 80.645,56.642 80.645,52.832 J5.1@82.296,51.181
PD7_02_PUL-: J5.2 U1.11 | length 17.2
  Top Layer w0.15: U1.11 69.526,62.935 72.136,60.325 77.978,60.325 82.096,56.207 82.096,55.445 J5.2
RATE_HX: IC2.15 R7.2 R11.1 | length 5.2
  Bottom Layer w0.15: R7.2 60.261,66.063 R11.1 ; R7.2@60.614,68.326 62.535,68.326 63.043,68.834 IC2.15
Reset: C1.1 D2.2 R4.1 S1.1 U1.29 | length 26.1
  Top Layer w0.15: C1.1 55.107,54.506 56.857,56.256 D2.2 56.857,59.411 R4.1 56.832,60.976 U1.29@59.591,63.735 ; U1.29 64.116,63.735 69.342,68.961 72.043,68.961 72.668,69.586 S1.1
RX: P1.4 U1.30 | length 22.2
  Top Layer w0.15: P1.4@55.949,44.958 55.374,44.958 55.008,45.325 55.005,45.325 54.61,45.72 54.61,48.006 55.372,48.768 56.134,48.768 57.785,50.419 57.785,61.341 59.293,62.849 60.18,62.849 U1.30
SCK: J11.3 U1.17 | length 7.3
  Top Layer w0.15: U1.17 67.316,69.094 68.06,69.838 70.092,69.838 72.422,72.168 J11.3
SW: C7.1 IC1.5 L2.1 | length 8.4
  Top Layer w0.5: IC1.5 65.444,41.529 66.619,42.704 L2.1 66.619,42.974 65.444,44.149 64.551,44.149 63.384,45.316 C7.1
TX: P1.5 U1.31 | length 16.9
  Top Layer w0.15: P1.5 55.753,47.877 56.12,48.243 56.12,48.246 58.166,50.292 58.166,60.71 59.591,62.135 U1.31
VBG_HX: C14.1 IC2.6 | length 6.7
  Bottom Layer w0.15: IC2.6 69.291,63.754 70.485,62.56 70.485,60.452 71.374,59.563 71.374,59.044 C14.1
VFB_HX: IC2.4 R6.1 R8.2 | length 6.5
  Bottom Layer w0.15: IC2.4 70.037,66.294 71.819,64.512 R6.1 71.719,64.162 R8.2
VIN: C8.2 IC1.2 IC1.3 J9.1 | length 19.6
  Top Layer w0.5: J9.1 52.197,35.052 58.813,35.052 61.076,37.315 C8.2 ; C8.2@61.103,37.493 61.103,40.551 IC1.3 IC1.2
XTLA1: C6.1 U1.7 Y1.2 | length 17.4
  Top Layer w0.15: C6.1@61.571,56.642 61.571,51.789 62.179,51.181 63.929,51.181 66.675,53.927 66.675,58.929 66.516,59.088 U1.7
XTLA2: C5.1 U1.8 Y1.1 | length 10.8
  Top Layer w0.15: U1.8 67.316,56.648 C5.1 67.703,54.725 70.224,52.204 70.224,52.156 71.199,51.181 Y1.1@71.679,51.181
pads on no net: IC2.9 IC2.10 IC2.13 P1.2 P1.3 S1.2 S1.3 U1.19 U1.22

## Polygon pours and split planes (outlines as drawn)
GND on GND02 "GND02" (solid, pour order 1): 25.4,25.4 177.8,25.4 177.8,127 25.4,127
GND on GND01 "GND01" (solid, pour order 0): 25.4,25.4 177.8,25.4 177.8,127 25.4,127

## Silkscreen, mask and mechanical layers (free items; w line width, h text height)
Top Overlay:
  drawing of 53 lines, arcs and shapes, not listed
  text "Zero" at 71.32,34.871 h1
  text "Gravity" at 71.247,33.133 h1.1
Mechanical 13:
  lines w0.254: 37.211,29.845 ccw(c40.64,29.845) 40.64,26.416 41.656,26.416 89.916,26.416 ccw(c89.916,29.337) 92.837,29.337 92.837,77.597 ccw(c89.916,77.597) 89.916,80.518 40.513,80.518 ccw(c40.513,77.216) 37.211,77.216 37.211,29.845